# Altium PCB SW-TH_SS-12D11G5R_2025-03-26.pcbdoc
Units mm, origin at the board's own origin, x right, y up, seen from the top; angles counter-clockwise.
Board outline 43.86 x 44.69 mm, 2 copper layers (Top Layer, Bottom Layer); 1 components, 0 nets, 5 pads, 0 vias.
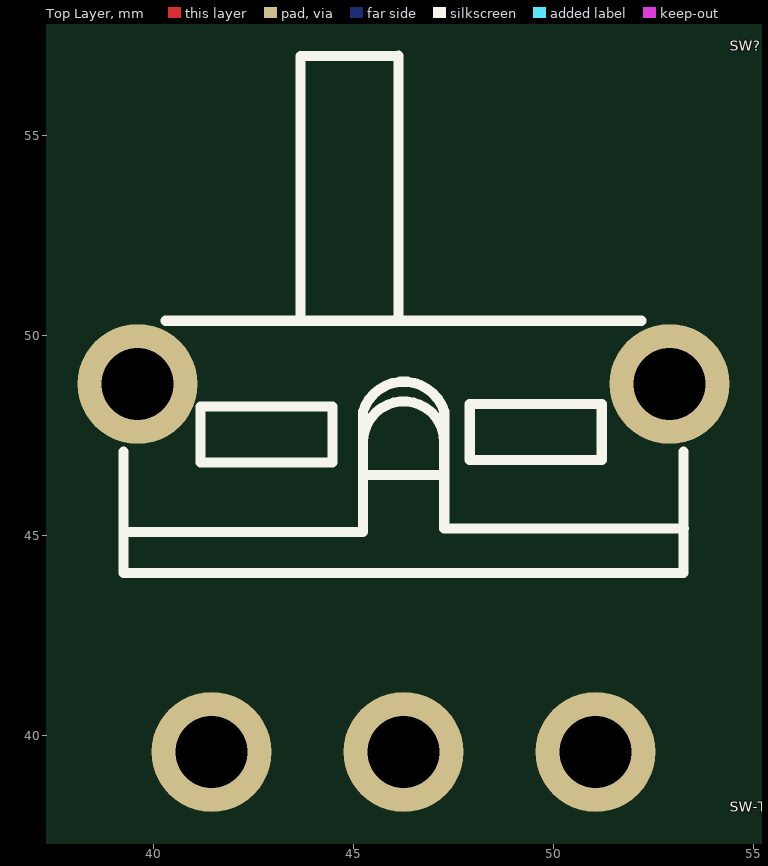
[diagram p0: Top Layer view]
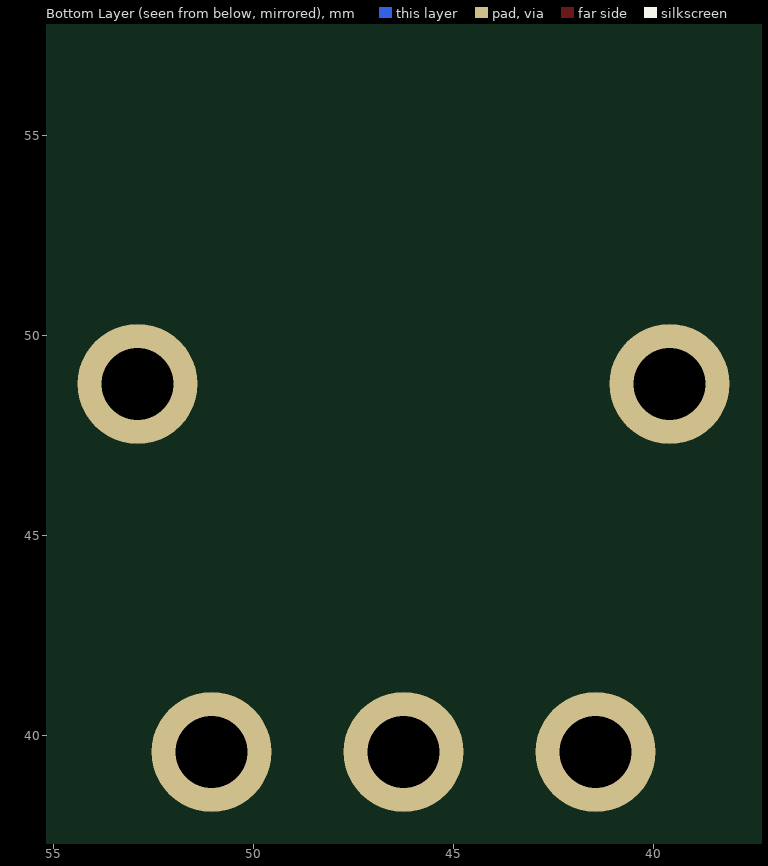
[diagram p1: Bottom Layer view, seen from below]

## Layer stack, top to bottom
Top Layer: signal copper (thickness not stored)
Dielectric: dielectric 0.32, FR-4, Dk 4.8
Bottom Layer: signal copper (thickness not stored)

## Board outline
69.259,25.4 25.4,25.4 25.4,70.088 69.259,70.088

## Components (designator, comment, footprint, x,y, rotation, side; value= is the part's Value field where it differs from the comment)
SW? "SW-TH_SS-12D11G5R" SW-TH_SS-12D11G5R 46.25,47.617 r0 top

## Footprints (in the part's own frame and the unit in brackets; to place one, negate y for a bottom-side part, rotate by r counter-clockwise, add the part's x,y. Pads: shape width x height; smd on the part's side, far side on the other; paste and mask are expansions set on the pad)
SW-TH_SS-12D11G5R [mm]
  round 3 hole 1.8 paste+0 mask+0.051: 1(-4.8,-8.017) 2(0,-8.017) 3(4.8,-8.017) 4(6.65,1.183) 5(-6.65,1.183)
  silkscreen extent -7,-3.55 7,9.39

## Nets (pads, with @x,y where several pads share a name; then routed paths per layer and width w, separated by ;. In a path a pad name is that pad's centre, name@x,y a point inside that pad or via, vN(x,y) a via of type N, cw(c..) or ccw(c..) an arc to the next point about the centre after c; other vN are vias at no path point)
pads on no net: SW?.1 SW?.2 SW?.3 SW?.4 SW?.5

## Silkscreen, mask and mechanical layers (free items; w line width, h text height)
Document:
  lines w0.003: 47.329,47.744 47.33,47.744